# Altium PCB Bokskort.PcbDoc
Units mm, origin at the board's own origin, x right, y up, seen from the top; angles counter-clockwise.
Board outline 98 x 23 mm, 2 copper layers (Top Layer, Bottom Layer); 12 components, 25 nets, 73 pads, 0 vias.
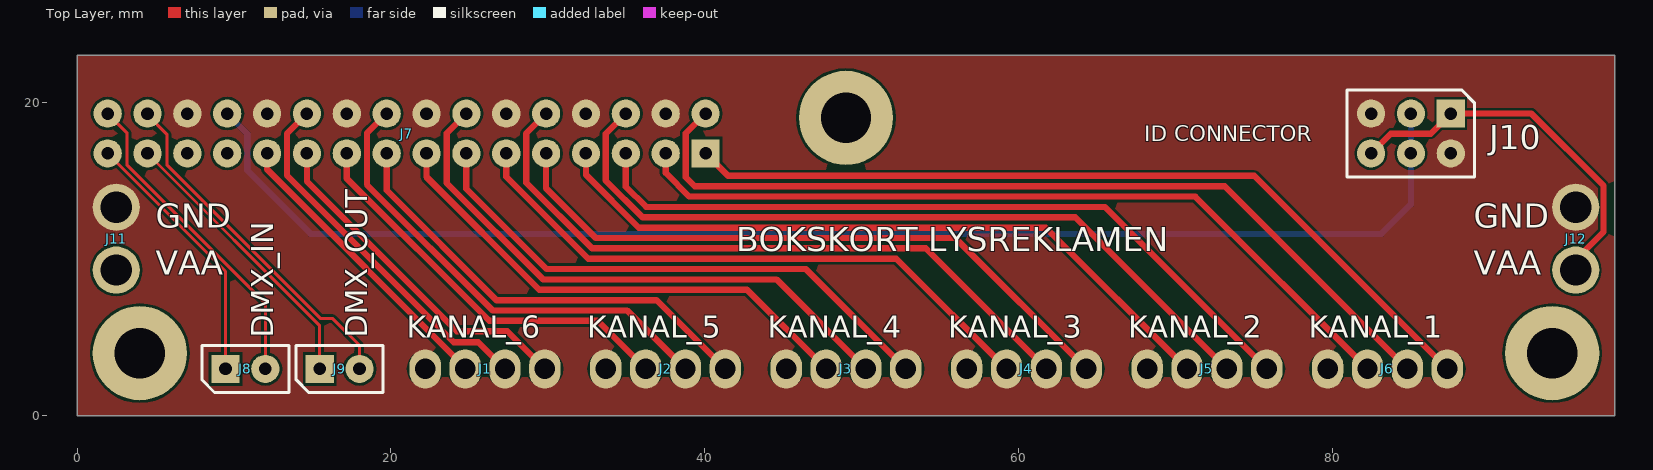
[diagram p0: Top Layer view]
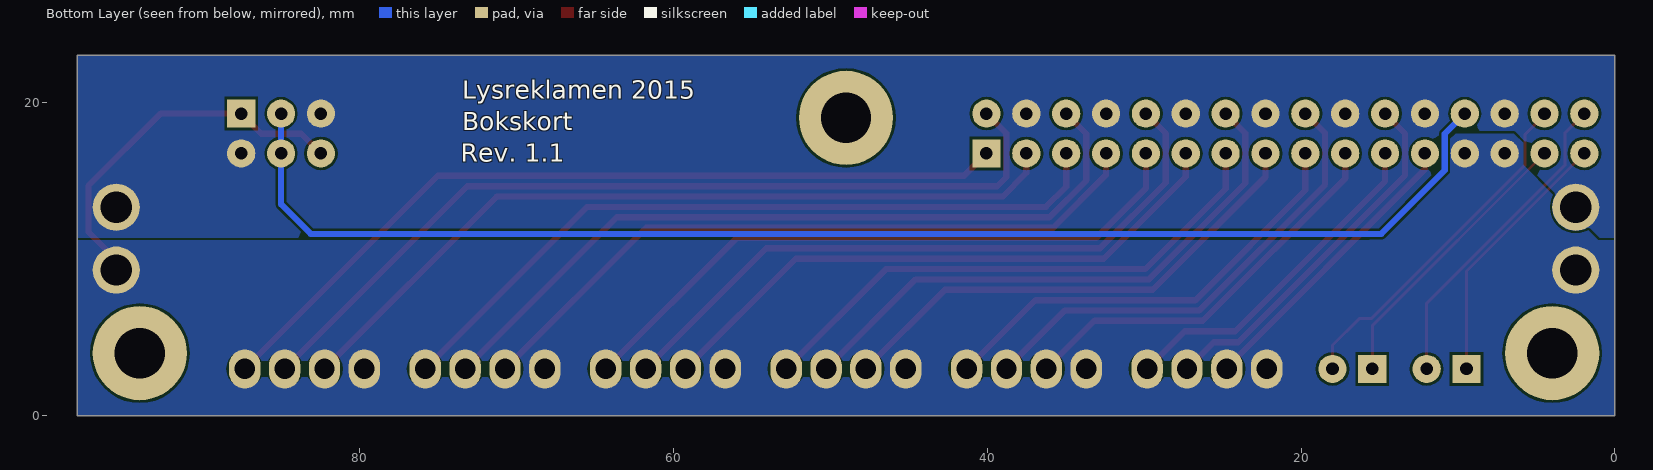
[diagram p1: Bottom Layer view, seen from below]

## Layer stack, top to bottom
Top Solder: solder mask 0.0102, Solder Resist, Dk 3.5
Top Layer: signal copper 0.0356
Dielectric 1: dielectric 0.32, FR-4, Dk 4.8
Bottom Layer: signal copper 0.0356
Bottom Solder: solder mask 0.0102, Solder Resist, Dk 3.5

## Board outline
0,0 0,23 98,23 98,0 0,0

## Design rules (kind name [scope] priority, off if disabled: settings)
Clearance [All] p1: gap=0.16 except(0: Arc-Text Track-Text SMDPad-Text THPad-Text Via-Text Fill-Text Poly-Text Region-Text Text-Text)
Height [All] p1: minheight=0 maxheight=200 prefheight=12.7
HoleSize [All] p1: absolutevalues=TRUE maxlimit=6.35 minlimit=0.3 maxpercent=80.000 minpercent=20.000
MinimumSolderMaskSliver [All] p1: minsoldermaskwidth=0.1
PlaneClearance [All] p1: clearance=1
PlaneConnect [All] p1: planeconnectstyle=Relief reliefexpansion=0.508 reliefentries=4 reliefconductorwidth=1 reliefairgap=0.254
PolygonConnect [All] p1: connectstyle=Direct reliefconductorwidth=0.254 reliefentries=4 polygonreliefangle="90 Angle" airgapwidth=0.254
RoutingVias [All] p1: holewidth=0.711 width=1.27 viastyle="Through Hole" minholewidth=0.711 minwidth=1.27 maxholewidth=0.711 maxwidth=1.27
SilkToSolderMaskClearance [IsPad] p1: minsilkscreentomaskgap=0.178 clearancetoexposedcopper=TRUE
SolderMaskExpansion [All] p1: expansion=0.102
Width [All] p1: maxlimit=10 minlimit=0.16 preferedwidth=0.4
24 further rules are at their usual default settings.

## Components (designator, comment, footprint, x,y, rotation, side; value= is the part's Value field where it differs from the comment)
J1 "4P_LED_Connector" LED_solder_connections 26,3 r180 top
J2 "4P_LED_Connector" LED_solder_connections 37.5,3 r180 top
J3 "4P_LED_Connector" LED_solder_connections 49,3 r180 top
J4 "4P_LED_Connector" LED_solder_connections 60.5,3 r180 top
J5 "4P_LED_Connector" LED_solder_connections 72,3 r180 top
J6 "4P_LED_Connector" LED_solder_connections 83.5,3 r180 top
J7 "Lysreklameparalellbusskontakt2015_FEMALE" HDRRAF32W64P254_2X16_4064X1260X600B 21,18 r270 top
J8 "Header 1x2" HDRV2W64P254_1X2_508X254X900B 12,3 r90 top
J9 "Header 1x2" HDRV2W64P254_1X2_508X254X900B 18,3 r90 top
J10 "Header2x3" HDRV6W64P254_2X3_762X508X900B 85,18 r270 top
J11 "navn" PSU_Holes_2mm 2.5,11.3 r180 top
J12 "navn" PSU_Holes_2mm 95.5,11.3 r180 top

## Footprints (in the part's own frame and the unit in brackets; to place one, negate y for a bottom-side part, rotate by r counter-clockwise, add the part's x,y. Pads: shape width x height; smd on the part's side, far side on the other; paste and mask are expansions set on the pad)
HDRRAF32W64P254_2X16_4064X1260X600B [mm] "Header Right Angle 2x16 Female"
  rect 1.8x1.8 hole 0.8: 1(1.27,19.05)
  round 1.8 hole 0.8: 2(-1.27,19.05) 3(1.27,16.51) 4(-1.27,16.51) 5(1.27,13.97) 6(-1.27,13.97) 7(1.27,11.43) 8(-1.27,11.43)
  round 1.8 hole 0.8 unplated: 9(1.27,8.89) 10(-1.27,8.89) 11(1.27,6.35) 12(-1.27,6.35) 13(1.27,3.81) 14(-1.27,3.81) 15(1.27,1.27) 16(-1.27,1.27) 17(1.27,-1.27) 18(-1.27,-1.27) 19(1.27,-3.81) 20(-1.27,-3.81) 21(1.27,-6.35) 22(-1.27,-6.35) 23(1.27,-8.89) 24(-1.27,-8.89) 25(1.27,-11.43) 26(-1.27,-11.43) 27(1.27,-13.97) 28(-1.27,-13.97) 29(1.27,-16.51) 30(-1.27,-16.51) 31(1.27,-19.05) 32(-1.27,-19.05)
  body extent -11.31,-20.57 1.47,20.57, height 5.02
HDRV2W64P254_1X2_508X254X900B [mm] "Header 1x2"
  rect 1.8x1.8 hole 0.8: 1(0,2.54)
  round 1.8 hole 0.8: 2(0,0)
  silkscreen extent -1.5,-1.5 1.5,4.04
HDRV6W64P254_2X3_762X508X900B [mm] "Header 2x3"
  rect 1.8x1.8 hole 0.8: 1(-1.27,2.54)
  round 1.8 hole 0.8: 2(1.27,2.54) 3(-1.27,0) 4(1.27,0) 5(-1.27,-2.54) 6(1.27,-2.54)
  silkscreen extent -2.77,-4.07 2.77,4.04, body extent -2.54,-3.81 2.54,3.81, height 8.45
LED_solder_connections [mm] "Solder points for wires"
  oval 2x2.5 hole 1.3: 1(-3.81,0) 2(-1.27,0) 3(1.27,0) 4(3.81,0)
PSU_Holes_2mm [mm]
  round 3 hole 2 unplated: 1(0,2) 2(0,-2)

## Part data
J8 J9: "2,54mm pitch"
J10: library part "Header 2x3", "2,54mm pitch"
J11 J12: library part 2PConnector

## Free pads (board coordinates)
  round 6 hole 3.2: 4(4,4) 4(49,19) 7(94,4)

## Nets (pads, with @x,y where several pads share a name; then routed paths per layer and width w, separated by ;. In a path a pad name is that pad's centre, name@x,y a point inside that pad or via, vN(x,y) a via of type N, cw(c..) or ccw(c..) an arc to the next point about the centre after c; other vN are vias at no path point)
DMX+: J7.29 J9.1 | length 18.3
  Top Layer w0.2: J7.29 15.46,5.76 J9.1
DMX+_RETUR: J7.31 J8.1 | length 16.8
  Top Layer w0.2: J7.31 1.95,16.723 9.46,9.213 J8.1
DMX-: J7.30 J9.2 | length 22.3
  Top Layer w0.2: J7.30 4.49,19.185 5.725,17.95 5.725,16.004 15.525,6.204 16.296,6.204 18,4.5 J9.2
DMX-_RETUR: J7.32 J8.2 | length 20.4
  Top Layer w0.2: J7.32 3.175,18.045 3.175,16.007 12,7.182 J8.2
GND: J7.4 J7.8 J7.12 J7.16 J7.20 J7.24 J7.28 J10.2 J10.5 J11.2 J12.2
KANAL_1-1: J6.1 J7.1 | length 52.9
  Top Layer w0.4: J7.1 41.48,15.3 75.01,15.3 J6.1
KANAL_2-1: J5.1 J7.5 | length 47.8
  Top Layer w0.4: J7.5 34.97,14.614 36.264,13.32 65.49,13.32 J5.1
KANAL_3-1: J4.1 J7.9 | length 41.4
  Top Layer w0.4: J7.9 29.89,14.494 33.044,11.34 55.97,11.34 J4.1
KANAL_4-1: J3.1 J7.13 | length 35
  Top Layer w0.4: J7.13 24.81,14.474 29.924,9.36 46.45,9.36 J3.1
KANAL_5-1: J2.1 J7.17 | length 28.6
  Top Layer w0.4: J7.17 19.73,14.379 26.729,7.38 36.93,7.38 J2.1
KANAL_6-1: J1.1 J7.21 | length 21.9
  Top Layer w0.4: J7.21 14.65,14.95 24.2,5.4 27.41,5.4 J1.1
NetJ1_2: J1.2 J7.22 | length 23.5
  Top Layer w0.4: J7.22 13.375,17.995 13.375,15.333 24.008,4.7 25.57,4.7 J1.2
NetJ1_3: J1.3 J7.23 | length 19
  Top Layer w0.4: J7.23 12.11,15.706 24.73,3.086 J1.3
NetJ2_2: J2.2 J7.18 | length 30.2
  Top Layer w0.4: J7.18 18.47,18.01 18.47,14.747 26.497,6.72 35.05,6.72 J2.2
NetJ2_3: J2.3 J7.19 | length 25.7
  Top Layer w0.4: J7.19 17.19,15.135 26.265,6.06 33.17,6.06 J2.3
NetJ3_2: J3.2 J7.14 | length 36.6
  Top Layer w0.4: J7.14 23.55,18.01 23.55,14.842 29.692,8.7 44.57,8.7 J3.2
NetJ3_3: J3.3 J7.15 | length 32
  Top Layer w0.4: J7.15 22.27,15.23 29.46,8.04 42.69,8.04 J3.3
NetJ4_2: J4.2 J7.10 | length 43
  Top Layer w0.4: J7.10 28.625,18.005 28.625,14.867 32.812,10.68 54.09,10.68 J4.2
NetJ4_3: J4.3 J7.11 | length 38.4
  Top Layer w0.4: J7.11 27.35,15.25 32.58,10.02 52.21,10.02 J4.3
NetJ5_2: J5.2 J7.6 | length 49.3
  Top Layer w0.4: J7.6 33.69,17.99 33.69,15.002 36.032,12.66 63.61,12.66 J5.2
NetJ5_3: J5.3 J7.7 | length 44.8
  Top Layer w0.4: J7.7 32.43,15.37 35.8,12 61.73,12 J5.3
NetJ6_2: J6.2 J7.2 | length 55.6
  Top Layer w0.4: J7.2 38.79,18.01 38.79,15.21 39.36,14.64 73.13,14.64 J6.2
NetJ6_3: J6.3 J7.3 | length 51.1
  Top Layer w0.4: J7.3 37.51,15.49 39.02,13.98 71.25,13.98 J6.3
NetJ7_26: J7.26 J10.3 J10.4 | length 86.5
  Bottom Layer w0.4: J7.26 10.85,17.99 10.85,15.65 14.9,11.6 83.1,11.6 85,13.5 J10.4 J10.3
VCC: J1.4 J2.4 J3.4 J4.4 J5.4 J6.4 J7.25 J7.27 J10.1 J10.6 J11.1 J12.1 | length 23.2
  Top Layer w0.4: J10.6 83.72,17.99 86.26,17.99 J10.1 92.68,19.27 97.275,14.675 97.275,11.735 J12.1@95.5,9.96

## Polygon pours and split planes (outlines as drawn)
GND on Bottom Layer "GND PLANE" (solid, remove dead copper, pour order 8): 0,11.2 0,23 98,23 98,11.2 0,11.2
VCC on Bottom Layer "VCC PLANE" (solid, remove dead copper, pour order 2): 10.85,16 10.85,17.3 10.15,18 6.45,18 5.85,17.4 5.85,16 1.05,11.2 15.65,11.2
VCC on Bottom Layer "VCC PLANE" (solid, remove dead copper, pour order 6): 0,0 0,11.2 98,11.2 98,0 0,0
GND on Top Layer "GND PLANE" (solid, remove dead copper, pour order 10): 0,0 0,23 98,23 98,0 0,0

## Silkscreen, mask and mechanical layers (free items; w line width, h text height)
Top Overlay:
  text "ID CONNECTOR" at 68,17.5 h1
  text "GND" at 5,12 h1.52
  text "GND" at 89,12 h1.52
  text "BOKSKORT LYSREKLAMEN" at 42,10.5 h1.52
  text "VAA" at 5,9 h1.52
  text "VAA" at 89,9 h1.52
  text "DMX_IN" at 12.5,5 h1.4 r90
  text "DMX_OUT" at 18.5,5 h1.4 r90
  text "KANAL_6" at 21,5 h1.4
  text "KANAL_5" at 32.5,5 h1.4
  text "KANAL_4" at 44,5 h1.4
  text "KANAL_3" at 55.5,5 h1.4
  text "KANAL_2" at 67,5 h1.4
  text "KANAL_1" at 78.5,5 h1.4
Bottom Overlay:
  text "Lysreklamen 2015" at 73.45,19.825 h2
  text "Bokskort" at 73.45,17.825 h2
  text "Rev. 1.1" at 73.55,15.825 h2